# Altium PCB PCB4.PcbDoc (part 5 of 5)
Units mm, origin at the board's own origin, x right, y up, seen from the top; angles counter-clockwise.
Board outline 240 x 180 mm, 2 copper layers (Top Layer, Bottom Layer); 259 components, 311 nets, 1128 pads, 419 vias.
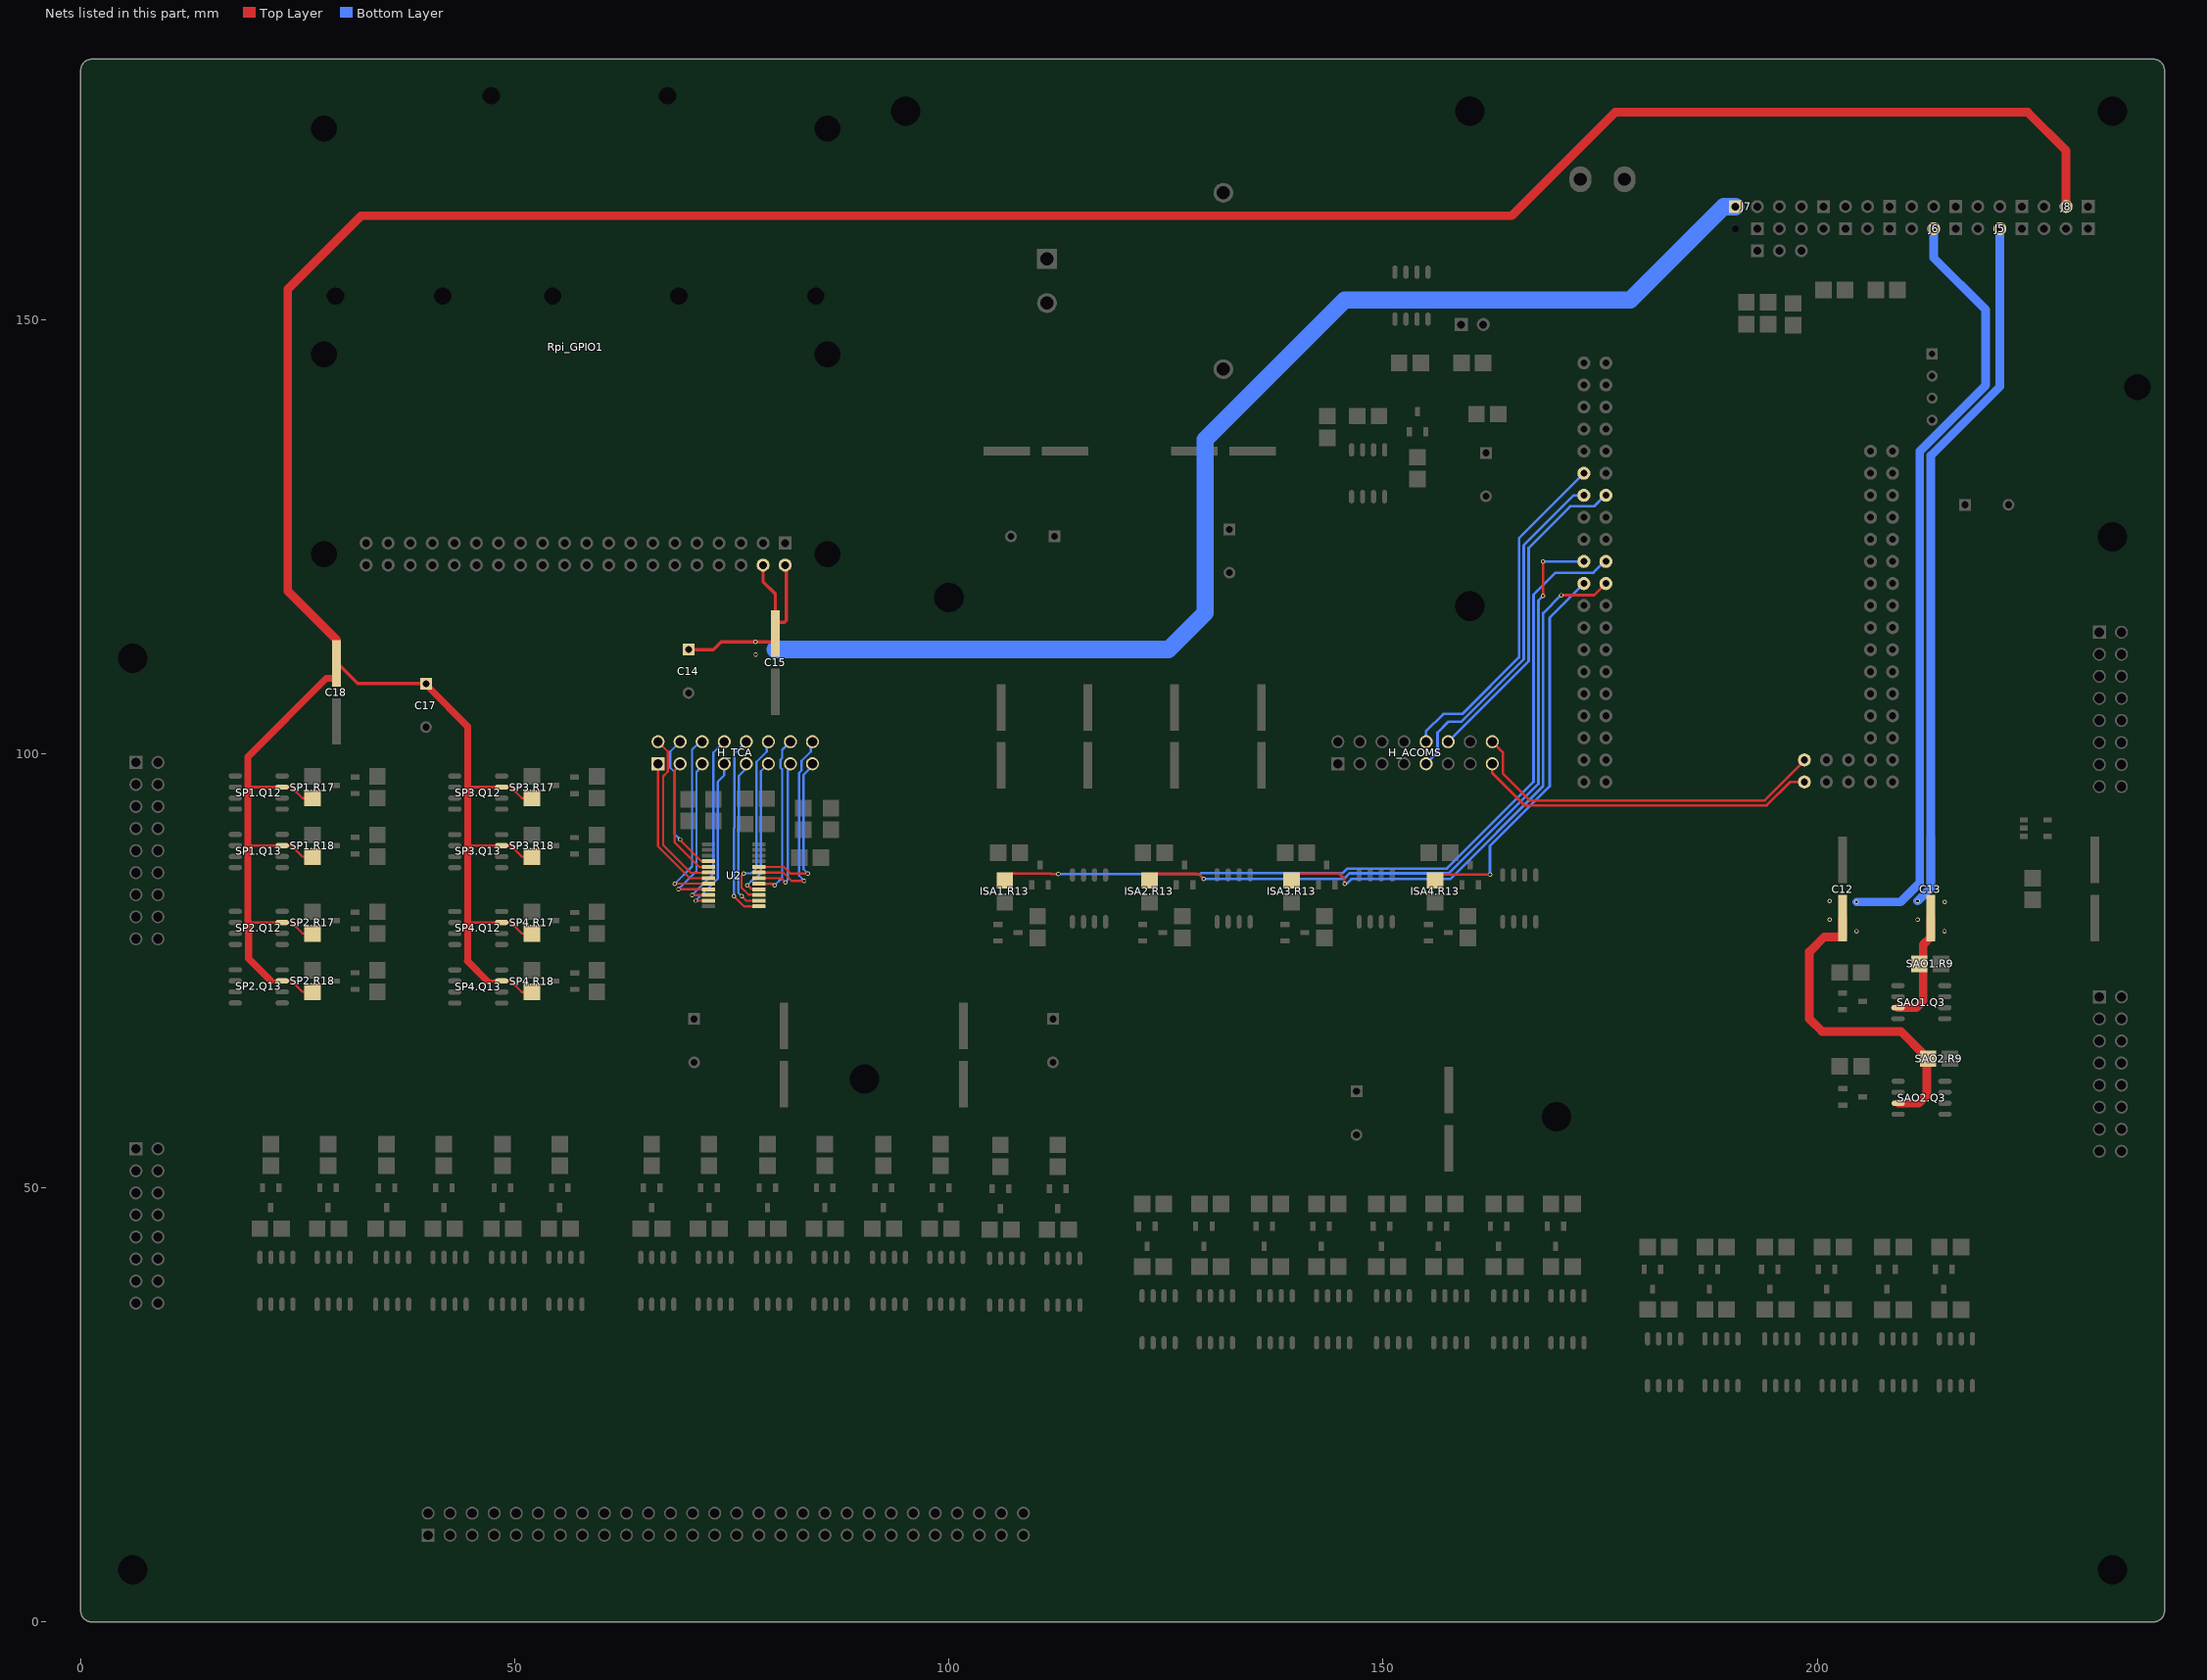
[diagram p4: the nets of this part, all layers, seen from the top]

## Via types
v1: diameter 0.5, hole 0.3, Top Layer to Bottom Layer, 387 vias
v2: diameter 0.5, hole 0.3, Top Layer to Bottom Layer, tented both sides, 24 vias
v3: diameter 1, hole 0.5, Top Layer to Bottom Layer, 8 vias

## Nets (pads, with @x,y where several pads share a name; then routed paths per layer and width w, separated by ;. In a path a pad name is that pad's centre, name@x,y a point inside that pad or via, vN(x,y) a via of type N, cw(c..) or ccw(c..) an arc to the next point about the centre after c; other vN are vias at no path point) (continued)
PWM1: H_ACOMS.12 pad.D4 | length 37.6
  Bottom Layer w0.305: H_ACOMS.12@157.5,101.39 166.768,110.658 166.768,123.714 171.554,128.5 174.3,128.5 175.57,129.77 pad.D4@175.666,129.77
PWM2: H_ACOMS.10 pad.D3 | length 39.7
  Bottom Layer w0.305: H_ACOMS.10@154.944,101.39 154.944,102.584 156.95,104.59 159.119,104.59 165.65,111.121 165.65,124.834 pad.D3@173.126,132.31
rpi_5v_1: C14.1 C15.1 J7.1 Rpi_GPIO1.2 Rpi_GPIO1.4 | length 171
  Top Layer w0.381: C14.1@70.004,112 72.877,112 73.747,112.87 v1(77.72,112.87) 79.694,112.87 80.004,113.18 C15.1@80.004,113.85 C15.1@80.004,114.842 ; Rpi_GPIO1.4@78.59,121.73 78.59,119.828 80.004,118.414 C15.1@80.004,114.842 ; Rpi_GPIO1.2@81.13,121.73 81.031,121.631 81.257,121.405 81.257,115.374 81.034,115.151 80.313,115.151 C15.1@80.004,114.842
  Bottom Layer w2: 80.004,112 125.28,112 129.506,116.226 129.506,136.192 145.578,152.264 178.478,152.264 189.234,163.02 J7.1@190.563,163.02
  other v1: 77.75,111.41
RSW1: ISA1.R13.1 pad.D10 | length 97.1
  Top Layer w0.305: ISA1.R13.1@106.439,85.41 107.237,86.208 111.745,86.208 111.803,86.151 v1(112.605,86.151)
  Bottom Layer w0.305: v1(112.605,86.151) 128.954,86.151 129.051,86.248 145.35,86.248 145.886,86.784 157.348,86.784 167.326,96.763 167.326,118.333 169.848,120.855 174.209,120.855 175.504,122.15 pad.D10@175.666,122.15
RSW2: ISA2.R13.1 pad.D11 | length 80.7
  Top Layer w0.305: ISA2.R13.1@123.097,85.41 123.894,86.208 128.464,86.208 128.538,86.133 128.782,86.133 v1(129.323,85.592) ; v1(168.437,118.208) v1(168.437,122.15)
  Bottom Layer w0.305: v1(129.323,85.592) 145.211,85.592 145.308,85.69 145.582,85.69 146.118,86.226 157.579,86.226 167.885,96.532 167.885,117.656 v1(168.437,118.208) ; v1(168.437,122.15) 172.582,122.15 172.854,121.878 pad.D11@173.126,122.15
RSW3: ISA3.R13.1 pad.D12 | length 63.4
  Top Layer w0.305: ISA3.R13.1@139.464,85.41 140.262,86.208 145.072,86.208 145.072,86.082 145.543,85.612 145.543,85.071 v1(145.58,85.033) ; v1(170.504,118.268) 174.324,118.268 pad.D12@175.666,119.61
  Bottom Layer w0.305: v1(145.58,85.033) 145.617,85.071 145.84,85.071 146.344,85.574 157.718,85.574 168.444,96.3 168.444,116.208 v1(170.504,118.268)
RSW4: ISA4.R13.1 pad.D13 | length 44.6
  Top Layer w0.305: ISA4.R13.1@155.994,85.41 156.681,86.097 v1(162.318,86.097)
  Bottom Layer w0.305: v1(162.318,86.097) 162.318,89.384 169.191,96.257 169.191,115.675 pad.D13@173.126,119.61
SAO1.Vss: C13.1 J5.2 SAO1.Q3.3 SAO1.R9.2 | length 94.9
  Top Layer w1: SAO1.Q3.3@209.3,70.753 211.414,70.753 212.2,71.539 212.2,75.35 SAO1.R9.2@211.75,75.8 212.2,76.25 212.2,78.015 213.08,78.895 C13.1@213.08,81.07
  Bottom Layer w1: v1(211.563,83.043) 213.08,84.56 213.08,134.344 ; 213.086,134.344 221.043,142.302 J5.2@221.043,160.48
  other v1: 214.662,79.57 211.563,80.901 214.693,82.934
SAO2.Vss: C12.1 J6.2 SAO2.Q3.3 SAO2.R9.2 | length 127.1
  Top Layer w1: C12.1@202.934,81.07 202.934,78.895 200.813,78.895 199.104,77.186 199.104,69.468 200.566,68.006 209.656,68.006 212.324,65.338 SAO2.R9.2@212.774,64.888 212.636,64.75 212.636,60.692 211.691,59.746 SAO2.Q3.3@209.324,59.746
  Bottom Layer w1: v1(204.548,82.934) 209.615,82.934 211.81,85.129 211.81,134.85 219.41,142.45 219.41,151.14 213.423,157.127 J6.2@213.423,160.48
  other v1: 204.517,79.57 201.417,80.901 201.417,83.043
SCK: H_ACOMS.15 pad.D52 | length 39.7
  Top Layer w0.305: H_ACOMS.15@162.58,98.85 162.58,97.77 166.289,94.061 194.185,94.061 196.873,96.75 pad.D52@198.526,96.75
SP1.Vss: C17.1 C18.1 J8.2 SP1.Q12.3 SP1.Q13.3 SP1.R17.2 SP1.R18.2 SP2.Q12.3 SP2.Q13.3 SP2.R17.2 SP2.R18.2 SP3.Q12.3 SP3.Q13.3 SP3.R17.2 SP3.R18.2 SP4.Q12.3 SP4.Q13.3 SP4.R17.2 SP4.R18.2 | length 416.6
  Top Layer w0.254: SP2.Q13.3@23.205,73.842 24.277,73.842 25.547,72.572 SP2.R18.2@26.696,72.572 ; SP2.Q12.3@23.205,80.577 24.277,80.577 25.547,79.307 SP2.R17.2@26.696,79.307 ; SP1.Q13.3@23.205,89.432 24.276,89.432 25.546,88.162 SP1.R18.2@26.696,88.162 ; SP1.Q12.3@23.205,96.166 24.276,96.166 25.546,94.896 SP1.R17.2@26.696,94.896 ; SP3.Q13.3@48.48,89.423 49.552,89.423 50.822,88.153 SP3.R18.2@51.971,88.153 ; SP3.Q12.3@48.48,96.158 49.552,96.158 50.822,94.888 SP3.R17.2@51.971,94.888 ; SP4.Q13.3@48.482,73.832 49.553,73.832 50.823,72.562 SP4.R18.2@51.973,72.562 ; SP4.Q12.3@48.482,80.567 49.553,80.567 50.823,79.297 SP4.R17.2@51.973,79.297
  Top Layer w0.305: 19.234,80.577 SP2.Q12.3@23.205,80.577 ; 19.234,89.432 SP1.Q13.3@23.205,89.432 ; 19.234,96.166 SP1.Q12.3@23.205,96.166 ; 21.893,73.842 SP2.Q13.3@23.205,73.842 ; 44.609,89.423 SP3.Q13.3@48.48,89.423 ; 44.609,96.158 SP3.Q12.3@48.48,96.158 ; 44.611,80.567 SP4.Q12.3@48.482,80.567 ; 46.836,73.832 SP4.Q13.3@48.482,73.832
  Top Layer w0.381: C18.1@29.47,110.521 31.91,108.081 39.638,108.081 C17.1@39.646,108.074
  Top Layer w0.61: C18.1@29.275,108.679 C18.1@29.275,110.663 ; C18.1@29.444,110.421 29.47,110.447 29.47,110.521 C18.1@29.47,111.321
  Top Layer w0.8: 19.234,80.577 19.234,82.242 ; 19.234,82.242 19.234,89.432 19.234,96.166 19.234,99.626 28.287,108.679 C18.1@29.157,108.679 ; 19.334,80.577 19.334,76.401 21.893,73.842 ; C17.1@39.646,108.074 C17.1@39.71,108.01 ; C17.1@39.774,108.074 40.049,107.799 40.049,107.667 44.582,103.134 44.582,96.158 44.582,89.423 44.582,80.567 44.582,76.12 ; 44.547,76.12 46.836,73.832
  Top Layer w1: C18.1@29.47,111.321 29.47,113.109 23.846,118.733 23.846,153.522 32.288,161.964 164.808,161.964 176.73,173.886 224.248,173.886 228.663,169.47 J8.2@228.663,163.03
SS: H_ACOMS.16 pad.D53 | length 42.2
  Top Layer w0.305: H_ACOMS.16@162.58,101.39 163.79,100.18 163.79,97.73 166.9,94.62 193.953,94.62 198.526,99.193 pad.D53@198.526,99.29
SSDI-12: H_ACOMS.9 pad.D5 | length 40
  Bottom Layer w0.305: H_ACOMS.9@154.96,98.85 156.28,100.17 156.28,102.44 157.54,103.7 159.02,103.7 166.209,110.889 166.209,124.03 171.948,129.77 pad.D5@173.126,129.77
tca_sc0: H_TCA.3 U2.5 | length 14.5
  Top Layer w0.254: H_TCA.3@69.04,98.85 69.04,98.701 68.42,98.081 68.42,89.787 71.232,86.975 U2.5@72.413,86.975
tca_sc1: H_TCA.1 U2.7 | length 16.9
  Top Layer w0.254: H_TCA.1@66.5,98.85 66.5,89.34 70.165,85.675 U2.7@72.363,85.675
tca_sc2: H_TCA.5 U2.9 | length 19.5
  Top Layer w0.254: v2(68.837,84.397) 68.848,84.386 72.771,84.386 U2.9@72.782,84.375
  Bottom Layer w0.254: v2(68.837,84.397) 70.924,86.484 70.924,97.907 71.58,98.562 H_TCA.5@71.58,98.85
tca_sc3: H_TCA.7 U2.11 | length 18.6
  Top Layer w0.254: v2(70.82,83.074) U2.11@72.309,83.075
  Bottom Layer w0.254: v2(70.82,83.074) 71.239,83.493 73.368,85.622 73.368,96.773 74.12,97.525 H_TCA.7@74.12,98.85
tca_sc4: H_TCA.9 U2.14 | length 17.9
  Top Layer w0.254: v2(76.116,83.602) 76.643,83.075 U2.14@78.057,83.075
  Bottom Layer w0.254: v2(76.116,83.602) 75.741,83.978 75.741,91.229 75.805,91.294 75.805,97.462 76.422,98.079 76.422,98.612 H_TCA.9@76.66,98.85
tca_sc5: H_TCA.11 U2.16 | length 16.5
  Top Layer w0.254: v2(76.76,84.844) 76.803,84.844 77.228,84.419 U2.16@77.977,84.419
  Bottom Layer w0.254: v2(76.76,84.844) 77.472,85.556 77.676,85.556 78.341,86.221 78.341,97.991 H_TCA.11@79.2,98.85
tca_sc6: H_TCA.13 U2.18 | length 17.1
  Top Layer w0.254: U2.18@78.134,85.675 80.678,85.675 v2(81.16,85.193)
  Bottom Layer w0.254: v2(81.16,85.193) 81.453,85.487 81.453,98.078 81.502,98.127 81.502,98.612 H_TCA.13@81.74,98.85
tca_sc7: H_TCA.15 U2.20 | length 19.2
  Top Layer w0.254: U2.20@78.109,86.975 80.989,86.975 81.76,86.204 v2(83.736,86.204)
  Bottom Layer w0.254: v2(83.736,86.204) 83.236,86.704 83.236,97.578 84.28,98.623 H_TCA.15@84.28,98.85
tca_sd0: H_TCA.4 U2.4 | length 16.6
  Top Layer w0.254: v2(69.051,90.126) 69.051,90.06 69.174,89.937 69.174,89.925 71.178,87.921 71.43,87.669 71.686,87.669 71.766,87.589 U2.4@72.345,87.589
  Bottom Layer w0.254: H_TCA.4@69.04,101.39 67.909,100.259 67.909,98.382 68.42,97.871 68.42,90.757 v2(69.051,90.126)
tca_sd1: H_TCA.2 U2.6 | length 19.3
  Top Layer w0.254: H_TCA.2@66.5,101.39 67.631,100.259 67.631,97.942 67.078,97.389 67.078,89.481 70.271,86.288 U2.6@72.414,86.288
tca_sd2: H_TCA.6 U2.8 | length 21.7
  Top Layer w0.254: v2(68.42,85.025) 68.445,85.05 72.274,85.05 U2.8@72.293,85.069
  Bottom Layer w0.254: v2(68.42,85.025) 70.416,87.021 70.416,100.462 71.344,101.39 H_TCA.6@71.58,101.39
tca_sd3: H_TCA.8 U2.10 | length 21.1
  Top Layer w0.254: v2(70.416,83.725) U2.10@72.309,83.725
  Bottom Layer w0.254: v2(70.416,83.725) 72.86,86.169 72.86,100.13 H_TCA.8@74.12,101.39
tca_sd4: H_TCA.10 U2.13 | length 21.3
  Top Layer w0.254: v2(75.233,83.593) 76.401,82.425 U2.13@77.704,82.425
  Bottom Layer w0.254: v2(75.233,83.593) 75.233,91.453 75.297,91.517 75.297,100.027 H_TCA.10@76.66,101.39
tca_sd5: H_TCA.12 U2.15 | length 20.9
  Top Layer w0.254: v2(76.372,86.221) 76.372,86.205 76.116,85.95 76.116,84.568 76.915,83.769 78.065,83.769 U2.15@78.109,83.725
  Bottom Layer w0.254: v2(76.372,86.221) 77.209,86.221 77.827,86.839 77.827,99.076 79.009,100.259 79.009,101.2 H_TCA.12@79.2,101.39
tca_sd6: H_TCA.14 U2.17 | length 19.5
  Top Layer w0.254: U2.17@77.91,85.025 79.684,85.025 79.856,84.852 v2(79.923,84.852)
  Bottom Layer w0.254: v2(79.923,84.852) 80.796,85.726 80.796,98.194 80.609,98.382 80.609,99.319 80.796,99.506 80.796,100.446 H_TCA.14@81.74,101.39
tca_sd7: H_TCA.16 U2.19 | length 22.6
  Top Layer w0.254: U2.19@78.084,86.325 80.92,86.325 81.879,85.366 v2(83.335,85.366)
  Bottom Layer w0.254: v2(83.335,85.366) 82.728,85.973 82.728,97.789 83.023,98.084 83.023,99.192 84.089,100.259 84.089,101.2 H_TCA.16@84.28,101.39
pads on no net: DHT1.0 DHT1.3 MH1.0 MH2.0 MH3.0 MH4.0 MH5.0 MH6.0 MH7.0 MH8.0 MH10.0 MH11.0 MH12.0 Q5.1 Q5.2 Q5.7 Q5.8 Rpi_GPIO1.0 Rpi_GPIO1.1 Rpi_GPIO1.17 Rpi_GPIO1.27 Rpi_GPIO1.28

## Polygon pours and split planes (outlines as drawn)
GND on Bottom Layer "Bottom Layer-GND" (solid, remove dead copper, pour order 298): 4,4 4,176 236,176 236,4
GND-12V on Bottom Layer "Bottom Layer-GND-12V" (solid, remove dead copper, pour order 219): 106.155,123.362 108.22,123.362 109.196,124.338 109.196,127.947 115.57,134.321 115.57,160.48 109.663,160.48 107.95,158.767 107.95,140.347 107.143,139.54 104.103,139.54 103.01,138.447 103.01,131.04 103.84,130.21 104.978,129.072 104.978,124.538
SAO1.Vss on Bottom Layer "SAO1.VSS_L02_P292" (solid, pour order 292): 215.446,83.404 214.43,84.42 211.69,84.42 210.581,83.311 210.581,79.079 211.936,77.724 214.294,77.724 215.446,78.876
SAO2.Vss on Bottom Layer "SAO2.VSS_L02_P220" (solid, pour order 220): 205.3,83.404 204.284,84.42 201.544,84.42 200.435,83.311 200.435,79.079 201.79,77.724 204.148,77.724 205.3,78.876
5V on Bottom Layer "Bottom Layer-5V 1" (solid, remove dead copper, pour order 215): 225.229,166.796 225.229,169.027 225.838,169.637 227.039,169.637 228.038,168.638 228.038,164.3 224.862,164.3 224.862,166.428
5V on Bottom Layer "Bottom Layer-5V" (solid, remove dead copper, pour order 217): 233.51,76.6 236.48,76.6 236.48,71.563 235.437,70.52 233.51,70.52
rpi_5v_1 on Bottom Layer "Bottom Layer-rpi_5v_1 1" (solid, remove dead copper, pour order 218): 76.83,113.76 82.88,113.76 82.88,112.03 81.27,110.42 76.83,110.42
GND on Top Layer "Top Layer-GND" (solid, remove dead copper, pour order 300): 4,4 4,176 236,176 236,4
PI_LS_2 on Top Layer "PI_LS_2_L01_P182" (solid, pour order 182): 16.747,88.714 16.599,88.566 16.599,86.382 16.934,86.047 17.955,86.047 17.955,88.714
SP1.Vss on Top Layer "SP1.VSS_L01_P229" (solid, pour order 229): 26.694,107.086 27.909,108.302 27.909,114.071 30.371,114.071 31.243,113.199 31.243,110.76 32.308,109.696 40.612,109.696 41.231,109.077 41.231,107.086 40.735,106.59 37.852,106.59 37.356,107.086
PI_HS_4 on Top Layer "PI_HS_4_L01_P180" (solid, pour order 180): 17.106,75.957 16.6,75.45 16.6,73.572 16.862,73.31 17.956,73.31 17.956,75.957
PI_LS_6 on Top Layer "PI_LS_6_L01_P181" (solid, pour order 181): 42.357,88.705 41.875,88.223 41.875,86.373 42.21,86.038 43.231,86.038 43.231,88.705
PI_LS_1 on Top Layer "PI_LS_1_L01_P183" (solid, pour order 183): 17.082,95.448 16.599,94.966 16.599,93.116 16.934,92.781 17.955,92.781 17.955,95.448
PI_LS_3 on Top Layer "PI_LS_3_L01_P184" (solid, pour order 184): 17.082,79.859 16.6,79.376 16.6,77.527 16.935,77.192 17.956,77.192 17.956,79.859
PI_LS_8 on Top Layer "PI_LS_8_L01_P185" (solid, pour order 185): 42.359,73.114 41.876,72.632 41.876,70.782 42.211,70.447 43.232,70.447 43.232,73.114
PI_LS_7 on Top Layer "PI_LS_7_L01_P186" (solid, pour order 186): 42.359,79.849 41.876,79.366 41.876,77.517 42.211,77.182 43.232,77.182 43.232,79.849
PI_LS_4 on Top Layer "PI_LS_4_L01_P187" (solid, pour order 187): 17.082,73.124 16.6,72.642 16.6,70.792 16.935,70.457 17.956,70.457 17.956,73.124
PI_HS_7 on Top Layer "PI_HS_7_L01_P188" (solid, pour order 188): 42.383,82.682 41.876,82.175 41.876,80.297 42.162,80.012 43.232,80.012 43.232,82.682
PI_HS_8 on Top Layer "PI_HS_8_L01_P189" (solid, pour order 189): 42.383,75.947 41.876,75.44 41.876,73.562 42.162,73.277 43.232,73.277 43.232,75.947
PI_HS_6 on Top Layer "PI_HS_6_L01_P190" (solid, pour order 190): 42.381,91.538 41.875,91.031 41.875,89.153 42.161,88.867 43.231,88.867 43.231,91.538
PI_LS_5 on Top Layer "PI_LS_5_L01_P191" (solid, pour order 191): 42.323,95.44 41.875,94.992 41.875,93.108 42.21,92.773 43.231,92.773 43.231,95.44
PI_HS_2 on Top Layer "PI_HS_2_L01_P192" (solid, pour order 192): 17.106,91.546 16.599,91.04 16.599,89.162 16.894,88.867 17.955,88.867 17.955,91.547
PI_HS_5 on Top Layer "PI_HS_5_L01_P193" (solid, pour order 193): 42.381,98.273 41.875,97.766 41.875,95.888 42.17,95.593 43.231,95.593 43.231,98.273
PI_HS_1 on Top Layer "PI_HS_1_L01_P194" (solid, pour order 194): 17.106,98.281 16.599,97.774 16.599,95.897 16.903,95.593 17.955,95.593 17.955,98.281
PI_HS_3 on Top Layer "PI_HS_3_L01_P195" (solid, pour order 195): 17.106,82.692 16.6,82.185 16.6,80.307 16.905,80.002 17.956,80.002 17.956,82.692
5V on Top Layer "5V_L01_P288" (solid, pour order 288): 98.831,65.557 104.546,65.557 105.943,66.954 112.011,66.954 114.925,64.04 117.823,61.142 117.823,58.652 119.25,58.652 119.781,59.183 129.867,59.184 154.394,59.184 155.678,57.9 158.916,57.9 160.65,59.634 160.65,63.65 159.165,65.135 156.076,65.135 154.29,63.35 122.142,63.35 119.746,65.746 113.18,72.312 105.036,72.312 102.322,75.026 100.201,75.026 97.7,72.524 70.495,72.524 69.04,71.069 69.04,68.128 70.214,66.954 77.21,66.954 78.607,65.557 83.84,65.557 85.237,66.954 97.434,66.954
INV_5V12V_LS_1 on Top Layer "INV_5V12V_LS_1_L01_P211" (solid, pour order 211): 116.182,79.891 116.925,79.147 118.323,79.147 118.849,79.673 118.849,80.799 116.182,80.799
INV_5V12V_LS_2 on Top Layer "INV_5V12V_LS_2_L01_P223" (solid, pour order 223): 132.712,79.89 133.454,79.148 134.855,79.148 135.379,79.672 135.379,80.798 132.712,80.798
INV_5V12V_HS_2 on Top Layer "INV_5V12V_HS_2_L01_P224" (solid, pour order 224): 129.879,79.65 130.382,79.147 131.969,79.147 132.559,79.737 132.559,80.798 129.879,80.798
INV_5V12V_LS_3 on Top Layer "INV_5V12V_LS_3_L01_P225" (solid, pour order 225): 149.242,79.89 149.985,79.147 151.384,79.147 151.909,79.672 151.909,80.798 149.242,80.798
INV_5V12V_HS_3 on Top Layer "INV_5V12V_HS_3_L01_P226" (solid, pour order 226): 146.409,79.672 146.933,79.148 148.5,79.148 149.089,79.737 149.089,80.798 146.409,80.798
INV_5V12V_LS_4 on Top Layer "INV_5V12V_LS_4_L01_P227" (solid, pour order 227): 165.772,79.89 166.514,79.148 167.915,79.148 168.439,79.672 168.439,80.798 165.772,80.798
INV_5V12V_HS_4 on Top Layer "INV_5V12V_HS_4_L01_P228" (solid, pour order 228): 162.939,79.672 163.464,79.147 165.029,79.147 165.619,79.737 165.619,80.798 162.939,80.798
12V on Top Layer "Top Layer-12V" (solid, pour order 209): 107.95,151 107.95,134.469 110.007,132.411 110.039,132.336 110.039,123.362 114.07,123.362 116.99,126.282 116.99,157.95 114.9,157.95
NetJ7_2 on Top Layer "NETJ7_2_L01_P231" (solid, pour order 231): 153.651,157.043 152.973,156.365 152.973,154.66 153.718,153.914 155.756,153.914 155.756,154.27 156.016,154.53 156.016,156.493 155.466,157.043
GND-12V on Top Layer "Top Layer-GND-12V" (solid, remove dead copper, pour order 206): 103,139.52 103.002,126.823 106.463,123.362 109.78,123.362 109.78,139.52
5V12V_LS_2 on Top Layer "5V12V_LS_2_L01_P197" (solid, remove dead copper, pour order 197): 213.994,63.131 213.994,60.475 216.276,60.475 216.914,61.113 216.914,62.338 216.12,63.131
SAO1.Vss on Top Layer "SAO1.VSS_L01_P295" (solid, pour order 295): 215.456,83.371 214.441,84.387 211.701,84.387 210.592,83.278 210.592,79.046 211.947,77.691 214.304,77.691 215.456,78.843
SAO2.Vss on Top Layer "SAO2.VSS_L01_P294" (solid, pour order 294): 205.311,83.371 204.295,84.387 201.555,84.387 200.446,83.278 200.446,79.046 201.801,77.691 204.159,77.691 205.311,78.843
NetC29_1 on Top Layer "NETC29_1_L01_P291" (solid, pour order 291): 148.353,128.853 149.095,128.11 150.495,128.11 151.02,128.635 151.02,129.761 148.352,129.761
HS_I2C_SW on Top Layer "HS_I2C_SW_L01_P290" (solid, pour order 290): 145.52,128.635 146.044,128.111 147.61,128.111 148.2,128.7 148.2,129.761 145.52,129.761
INV_5V12V_HS_1 on Top Layer "INV_5V12V_HS_1_L01_P222" (solid, pour order 222): 113.349,79.673 113.959,79.063 115.354,79.063 116.029,79.738 116.029,80.799 113.349,80.799
5V on Top Layer "5V_L01_P230" (solid, pour order 230): 141.854,141.75 141.854,138.124 146.418,133.56 151.516,133.56 151.516,137.111 146.877,141.75
5V_HS_13 on Top Layer "5V_HS_13_L01_P257" (solid, remove dead copper, pour order 257): 106.582,37.223 103.832,37.223 103.832,35.518 104.73,34.62 105.684,34.62 106.582,35.518
5V_HS_6 on Top Layer "5V_HS_6_L01_P243" (solid, remove dead copper, pour order 243): 55.826,37.328 53.076,37.328 53.076,35.623 53.974,34.725 54.927,34.725 55.826,35.623
5V_HS_5 on Top Layer "5V_HS_5_L01_P241" (solid, remove dead copper, pour order 241): 49.222,37.328 46.472,37.328 46.472,35.623 47.37,34.725 48.324,34.725 49.222,35.623
5V_LS_12 on Top Layer "5V_LS_12_L01_P254" (solid, remove dead copper, pour order 254): 102.446,37.328 99.79,37.328 99.79,35.529 100.594,34.725 101.548,34.725 102.446,35.623
5V_HS_28 on Top Layer "5V_HS_28_L01_P287" (solid, remove dead copper, pour order 287): 215.968,27.945 213.218,27.945 213.218,26.24 214.116,25.342 215.07,25.342 215.968,26.24
5V_LS_28 on Top Layer "5V_LS_28_L01_P286" (solid, remove dead copper, pour order 286): 218.718,27.945 216.063,27.945 216.063,26.146 216.866,25.342 217.82,25.342 218.718,26.24
5V_HS_27 on Top Layer "5V_HS_27_L01_P285" (solid, remove dead copper, pour order 285): 209.365,27.945 206.615,27.945 206.615,26.24 207.513,25.342 208.467,25.342 209.365,26.24
5V_LS_27 on Top Layer "5V_LS_27_L01_P284" (solid, remove dead copper, pour order 284): 212.115,27.945 209.46,27.945 209.46,26.146 210.263,25.342 211.217,25.342 212.115,26.24
5V_HS_26 on Top Layer "5V_HS_26_L01_P283" (solid, remove dead copper, pour order 283): 202.47,27.947 199.72,27.947 199.72,26.242 200.618,25.344 201.572,25.344 202.47,26.242
5V_LS_26 on Top Layer "5V_LS_26_L01_P282" (solid, remove dead copper, pour order 282): 205.22,27.947 202.565,27.947 202.565,26.148 203.368,25.344 204.322,25.344 205.22,26.242
5V_HS_25 on Top Layer "5V_HS_25_L01_P281" (solid, remove dead copper, pour order 281): 195.867,27.947 193.117,27.947 193.117,26.242 194.015,25.344 194.969,25.344 195.867,26.242
5V_LS_25 on Top Layer "5V_LS_25_L01_P280" (solid, remove dead copper, pour order 280): 198.617,27.947 195.961,27.947 195.961,26.148 196.765,25.344 197.719,25.344 198.617,26.242
5V_HS_24 on Top Layer "5V_HS_24_L01_P279" (solid, remove dead copper, pour order 279): 188.972,27.947 186.222,27.947 186.222,26.242 187.12,25.344 188.074,25.344 188.972,26.242
5V_LS_24 on Top Layer "5V_LS_24_L01_P278" (solid, remove dead copper, pour order 278): 191.722,27.947 189.066,27.947 189.066,26.148 189.87,25.344 190.824,25.344 191.722,26.242
5V_HS_23 on Top Layer "5V_HS_23_L01_P277" (solid, remove dead copper, pour order 277): 182.369,27.947 179.619,27.947 179.619,26.242 180.517,25.344 181.471,25.344 182.369,26.242
5V_LS_23 on Top Layer "5V_LS_23_L01_P276" (solid, remove dead copper, pour order 276): 185.119,27.947 182.463,27.947 182.463,26.148 183.267,25.344 184.221,25.344 185.119,26.242
5V_HS_22 on Top Layer "5V_HS_22_L01_P275" (solid, remove dead copper, pour order 275): 171.245,32.896 168.495,32.896 168.495,31.191 169.393,30.293 170.347,30.293 171.245,31.191
5V_LS_22 on Top Layer "5V_LS_22_L01_P274" (solid, remove dead copper, pour order 274): 173.995,32.896 171.34,32.896 171.34,31.096 172.143,30.293 173.097,30.293 173.995,31.191
5V_HS_21 on Top Layer "5V_HS_21_L01_P273" (solid, remove dead copper, pour order 273): 164.642,32.896 161.892,32.896 161.892,31.191 162.79,30.293 163.744,30.293 164.642,31.191
5V_LS_21 on Top Layer "5V_LS_21_L01_P272" (solid, remove dead copper, pour order 272): 167.392,32.896 164.736,32.896 164.736,31.096 165.54,30.293 166.494,30.293 167.392,31.191
5V_HS_20 on Top Layer "5V_HS_20_L01_P271" (solid, remove dead copper, pour order 271): 157.745,32.897 154.995,32.897 154.995,31.192 155.893,30.294 156.847,30.294 157.745,31.192
5V_LS_20 on Top Layer "5V_LS_20_L01_P270" (solid, remove dead copper, pour order 270): 160.495,32.897 157.84,32.897 157.84,31.098 158.643,30.294 159.597,30.294 160.495,31.192
5V_HS_19 on Top Layer "5V_HS_19_L01_P269" (solid, remove dead copper, pour order 269): 151.142,32.897 148.392,32.897 148.392,31.192 149.29,30.294 150.244,30.294 151.142,31.192
5V_LS_19 on Top Layer "5V_LS_19_L01_P268" (solid, remove dead copper, pour order 268): 153.892,32.897 151.236,32.897 151.236,31.098 152.04,30.294 152.994,30.294 153.892,31.192
5V_HS_18 on Top Layer "5V_HS_18_L01_P267" (solid, remove dead copper, pour order 267): 144.247,32.897 141.497,32.897 141.497,31.192 142.395,30.294 143.349,30.294 144.247,31.192
5V_LS_18 on Top Layer "5V_LS_18_L01_P266" (solid, remove dead copper, pour order 266): 146.997,32.897 144.342,32.897 144.342,31.098 145.145,30.294 146.099,30.294 146.997,31.192
5V_HS_17 on Top Layer "5V_HS_17_L01_P265" (solid, remove dead copper, pour order 265): 137.644,32.897 134.894,32.897 134.894,31.192 135.792,30.294 136.746,30.294 137.644,31.192
5V_LS_17 on Top Layer "5V_LS_17_L01_P264" (solid, remove dead copper, pour order 264): 140.394,32.897 137.738,32.897 137.738,31.098 138.542,30.294 139.496,30.294 140.394,31.192
5V_HS_16 on Top Layer "5V_HS_16_L01_P263" (solid, remove dead copper, pour order 263): 130.751,32.897 128.001,32.897 128.001,31.192 128.899,30.294 129.853,30.294 130.751,31.192
5V_LS_16 on Top Layer "5V_LS_16_L01_P262" (solid, remove dead copper, pour order 262): 133.501,32.897 130.846,32.897 130.846,31.098 131.649,30.294 132.603,30.294 133.501,31.192
5V_HS_15 on Top Layer "5V_HS_15_L01_P261" (solid, remove dead copper, pour order 261): 124.148,32.897 121.398,32.897 121.398,31.192 122.296,30.294 123.25,30.294 124.148,31.192
5V_LS_15 on Top Layer "5V_LS_15_L01_P260" (solid, remove dead copper, pour order 260): 126.898,32.897 124.242,32.897 124.242,31.098 125.046,30.294 126,30.294 126.898,31.192
5V_HS_14 on Top Layer "5V_HS_14_L01_P259" (solid, remove dead copper, pour order 259): 113.185,37.223 110.435,37.223 110.435,35.518 111.333,34.62 112.287,34.62 113.185,35.518
5V_LS_14 on Top Layer "5V_LS_14_L01_P258" (solid, remove dead copper, pour order 258): 115.935,37.223 113.28,37.223 113.28,35.424 114.083,34.62 115.037,34.62 115.935,35.518
5V_LS_13 on Top Layer "5V_LS_13_L01_P256" (solid, remove dead copper, pour order 256): 109.332,37.223 106.676,37.223 106.676,35.424 107.48,34.62 108.434,34.62 109.332,35.518
5V_HS_12 on Top Layer "5V_HS_12_L01_P255" (solid, remove dead copper, pour order 255): 99.696,37.328 96.946,37.328 96.946,35.623 97.844,34.725 98.797,34.725 99.696,35.623
5V_HS_11 on Top Layer "5V_HS_11_L01_P253" (solid, remove dead copper, pour order 253): 93.092,37.328 90.342,37.328 90.342,35.623 91.24,34.725 92.194,34.725 93.092,35.623
5V_LS_11 on Top Layer "5V_LS_11_L01_P252" (solid, remove dead copper, pour order 252): 95.842,37.328 93.187,37.328 93.187,35.529 93.99,34.725 94.944,34.725 95.842,35.623
5V_HS_10 on Top Layer "5V_HS_10_L01_P251" (solid, remove dead copper, pour order 251): 86.354,37.328 83.604,37.328 83.604,35.623 84.502,34.725 85.455,34.725 86.354,35.623
5V_LS_10 on Top Layer "5V_LS_10_L01_P250" (solid, remove dead copper, pour order 250): 89.104,37.328 86.448,37.328 86.448,35.529 87.252,34.725 88.206,34.725 89.104,35.623
5V_HS_9 on Top Layer "5V_HS_9_L01_P249" (solid, remove dead copper, pour order 249): 79.75,37.328 77,37.328 77,35.623 77.898,34.725 78.852,34.725 79.75,35.623
5V_LS_9 on Top Layer "5V_LS_9_L01_P248" (solid, remove dead copper, pour order 248): 82.5,37.328 79.845,37.328 79.845,35.529 80.648,34.725 81.602,34.725 82.5,35.623
5V_HS_8 on Top Layer "5V_HS_8_L01_P247" (solid, remove dead copper, pour order 247): 73.014,37.328 70.264,37.328 70.264,35.623 71.162,34.725 72.115,34.725 73.014,35.623
5V_LS_8 on Top Layer "5V_LS_8_L01_P246" (solid, remove dead copper, pour order 246): 75.764,37.328 73.108,37.328 73.108,35.529 73.912,34.725 74.866,34.725 75.764,35.623
5V_HS_7 on Top Layer "5V_HS_7_L01_P245" (solid, remove dead copper, pour order 245): 66.41,37.328 63.66,37.328 63.66,35.623 64.558,34.725 65.512,34.725 66.41,35.623
5V_LS_7 on Top Layer "5V_LS_7_L01_P244" (solid, remove dead copper, pour order 244): 69.16,37.328 66.505,37.328 66.505,35.529 67.308,34.725 68.262,34.725 69.16,35.623
5V_LS_6 on Top Layer "5V_LS_6_L01_P242" (solid, remove dead copper, pour order 242): 58.576,37.328 55.92,37.328 55.92,35.529 56.724,34.725 57.678,34.725 58.576,35.623
5V_LS_5 on Top Layer "5V_LS_5_L01_P240" (solid, remove dead copper, pour order 240): 51.972,37.328 49.317,37.328 49.317,35.529 50.12,34.725 51.074,34.725 51.972,35.623
5V_HS_4 on Top Layer "5V_HS_4_L01_P239" (solid, remove dead copper, pour order 239): 42.484,37.328 39.734,37.328 39.734,35.623 40.632,34.725 41.585,34.725 42.484,35.623
5V_LS_4 on Top Layer "5V_LS_4_L01_P238" (solid, remove dead copper, pour order 238): 45.234,37.328 42.578,37.328 42.578,35.529 43.382,34.725 44.336,34.725 45.234,35.623
5V_HS_3 on Top Layer "5V_HS_3_L01_P237" (solid, remove dead copper, pour order 237): 35.88,37.328 33.13,37.328 33.13,35.623 34.028,34.725 34.982,34.725 35.88,35.623
5V_LS_3 on Top Layer "5V_LS_3_L01_P236" (solid, remove dead copper, pour order 236): 38.63,37.328 35.975,37.328 35.975,35.529 36.778,34.725 37.732,34.725 38.63,35.623
5V_HS_2 on Top Layer "5V_HS_2_L01_P235" (solid, remove dead copper, pour order 235): 29.142,37.329 26.392,37.329 26.392,35.624 27.29,34.726 28.243,34.725 29.142,35.624
5V_LS_2 on Top Layer "5V_LS_2_L01_P234" (solid, remove dead copper, pour order 234): 31.892,37.329 29.236,37.329 29.236,35.529 30.04,34.726 30.994,34.726 31.892,35.624
5V_HS_1 on Top Layer "5V_HS_1_L01_P233" (solid, remove dead copper, pour order 233): 22.538,37.329 19.788,37.329 19.788,35.624 20.686,34.726 21.64,34.725 22.538,35.624
5V_LS_1 on Top Layer "5V_LS_1_L01_P232" (solid, remove dead copper, pour order 232): 25.288,37.329 22.633,37.329 22.633,35.529 23.436,34.726 24.39,34.726 25.288,35.624
5V on Top Layer "Top Layer-5V" (solid, remove dead copper, pour order 210): 131.539,130.725 134.975,127.289 134.975,124.26 133.893,123.178 131.229,123.178 129.93,124.477 129.93,126.155 124.614,131.471 124.614,142.223 129.541,147.15 133.466,147.15 135.624,144.992 135.624,139.525 135.549,139.493 134.356,138.301 133.085,138.301 133.009,138.269 131.539,136.798
5V12V_HS_2 on Top Layer "5V12V_HS_2_L01_P200" (solid, remove dead copper, pour order 200): 213.994,60.381 213.994,57.631 216.372,57.631 216.913,58.173 216.914,59.727 216.259,60.381
rpi_5v_1 on Top Layer "Bottom Layer-rpi_5v_1" (solid, remove dead copper, pour order 208): 68.34,111.12 68.34,112.95 69.05,113.66 75.784,113.66 77.014,114.89 77.014,123.02 82.76,123.02 82.76,111.91 81.27,110.42 69.04,110.42
5V12V_HS_1 on Top Layer "5V12V_HS_1_L01_P199" (solid, remove dead copper, pour order 199): 213.97,71.388 213.97,68.638 215.675,68.638 216.573,69.536 216.573,70.49 215.675,71.388
5V12V_LS_1 on Top Layer "5V12V_LS_1_L01_P198" (solid, remove dead copper, pour order 198): 213.97,74.138 213.97,71.483 215.77,71.483 216.573,72.286 216.573,73.24 215.675,74.138
5V on Top Layer "Top Layer-5V 2" (solid, remove dead copper, pour order 205): 225.26,161.357 225.224,169.018 225.836,169.63 226.701,169.63 227.872,168.459 227.872,158.63 227.235,158.63 226.918,158.947 226.918,160.084 225.645,161.357
5V on Top Layer "Top Layer-5V 1" (solid, remove dead copper, pour order 204): 233.53,76.24 236.5,76.24 236.5,71.68 235.34,70.52 233.53,70.52
3.3V on Top Layer "Top Layer-3.3V" (solid, remove dead copper, pour order 196): 226.257,96.05 226.06,95.853 226.06,92.03 230.684,92.03

## Silkscreen, mask and mechanical layers (free items; w line width, h text height)
Top Overlay:
  drawing of 35 lines, arcs and shapes, not listed
  text "12V" at 169.3,172 h3
  text "GND" at 176,172 h3
  text "Rev ._Revision" at 208.343,171.59 h2
  text "RSW10" at 195.144,167.138 h2
  text "RSW11" at 202.51,167.138 h2
  text "RSW12" at 210.892,167.138 h2
  text "RSW13" at 218.258,167.138 h2
  text "PiSW_LV" at 225.878,167.138 h1.52
  text "THE UNIVERSITY  / OF QUEENSLAND" at 42.969,165.737 h1.56
  text "R PWR" at 189.667,165.306 h1.52
  text "5V" at 195.024,165.306 h1.52
  text "12V" at 199.453,165.306 h1.52
  text "5V" at 202.501,165.306 h1.52
  text "12V" at 207.133,165.306 h1.52
  text "5V" at 209.867,165.306 h1.52
  text "12V" at 214.693,165.306 h1.52
  text "5V" at 217.741,165.306 h1.52
  text "12V" at 222.313,165.306 h1.52
  text "5V" at 225.361,165.306 h1.52
  text "3V3" at 229.933,165.306 h1.52
  text "AUSTRALIA" at 43.453,163.701 h1.17
  text "GEOTECHNICAL / ENGINEERING / CENTER" at 64.965,163.456 h1.56 r359.91
  text "Rev ._Revision" at 65.171,160.51 h2
  text "PLUG-IN" at 170.1,158.5 h3
  text "LS" at 207.65,157.449 h1.52
  text "HS" at 200.025,157.432 h1.52
  text "5V" at 209.876,157.432 h1.52
  text "12V" at 214.693,157.432 h1.52
  text "5V" at 217.487,157.432 h1.52
  text "12V" at 222.313,157.432 h1.52
  text "GND" at 225.361,157.432 h1.8
  text "G-12" at 229.171,157.432 h1.8
  text "Vsense" at 200.593,155.5 h2.3
  text "SW9_LV" at 210,155.5 h2
  text "SW8_LV" at 217.6,155.5 h2
  text "Sftw" at 191.8,155.282 h1.52
  text "Hdw" at 196.522,155.252 h1.52
  text "Tx/Rx" at 192.856,153.6 h2.3
  text "**" at 159.604,147.804 h1.52 r180
  text "U1" at 169.033,96.116 h1.6
Bottom Overlay:
  drawing of 4 lines, arcs and shapes, not listed
  text "THE UNIVERSITY  / OF QUEENSLAND" at 142.866,169.862 h1.56
  text "AUSTRALIA" at 142.383,167.826 h1.17
  text "GEOTECHNICAL / ENGINEERING / CENTER" at 120.87,167.581 h1.56 r0.09
  text "Rev ._Revision" at 120.202,164.635 h2
Drill Guide:
  lines w0.254: 1.27,0 cw(c1.27,1.27) 0,1.27 0,178.73 cw(c1.27,178.73) 1.27,180 238.73,180 cw(c238.73,178.73) 240,178.73 240,1.27 cw(c238.73,1.27) 238.73,0 1.3,0
Mechanical 1:
  the board outline again, w0.254
Drill Drawing:
  drawing of 165 lines, arcs and shapes, not listed
  text "Symbol" at 1.05,249.358 h1.83
  text "Count" at 13.899,249.358 h1.83
  text "Hole Size" at 29.135,249.358 h1.83
  text "Plated" at 58.336,249.358 h1.83
  text "Hole Type" at 71.185,249.358 h1.83
  text "Drill Layer Pair" at 89.824,249.358 h1.83
  text "Via/Pad" at 127.913,249.358 h1.83
  text "Pad Shape" at 142.895,249.358 h1.83
  text "Template" at 161.838,249.358 h1.83
  text "Description" at 191.801,249.358 h1.83
  text "Hole Tolerance (+)" at 213.487,249.358 h1.83
  text "Hole Tolerance (-)" at 247.36,249.358 h1.83
  text "1" at 13.899,245.548 h1.52
  text "35.43mil (0.900mm)" at 29.135,245.548 h1.52
  text "NPTH" at 58.336,245.548 h1.52
  text "Round" at 71.185,245.548 h1.52
  text "Top Layer - Bottom Layer" at 89.824,245.548 h1.52
  text "Pad" at 127.913,245.548 h1.52
  text "Rounded" at 142.895,245.548 h1.52
  text "c90hn90m90" at 161.838,245.548 h1.52
  text "1" at 13.899,241.738 h1.52
  text "118.11mil (3.000mm)" at 29.135,241.738 h1.52
  text "NPTH" at 58.336,241.738 h1.52
  text "Round" at 71.185,241.738 h1.52
  text "Top Layer - Bottom Layer" at 89.824,241.738 h1.52
  text "Pad" at 127.913,241.738 h1.52
  text "Rounded" at 142.895,241.738 h1.52
  text "c0hn300(Tol14)" at 161.838,241.738 h1.52
  text "5.51mil (0.140mm)" at 213.487,241.738 h1.52
  text "2" at 13.899,237.928 h1.52
  text "59.06mil (1.500mm)" at 29.135,237.928 h1.52
  text "PTH" at 58.336,237.928 h1.52
  text "Round" at 71.185,237.928 h1.52
  text "Top Layer - Bottom Layer" at 89.824,237.928 h1.52
  text "Pad" at 127.913,237.928 h1.52
  text "Rounded" at 142.895,237.928 h1.52
  text "r250_300h150r100" at 161.838,237.928 h1.52
  text "4" at 13.899,234.118 h1.52
  text "30.00mil (0.762mm)" at 29.135,234.118 h1.52
  text "PTH" at 58.336,234.118 h1.52
  text "Round" at 71.185,234.118 h1.52
  text "Top Layer - Bottom Layer" at 89.824,234.118 h1.52
  text "Pad" at 127.913,234.118 h1.52
  text "(Mixed)" at 142.895,234.118 h1.52
  text "(Mixed)" at 161.838,234.118 h1.52
  text "4" at 13.899,230.308 h1.52
  text "60.00mil (1.524mm)" at 29.135,230.308 h1.52
  text "PTH" at 58.336,230.308 h1.52
  text "Round" at 71.185,230.308 h1.52
  text "Top Layer - Bottom Layer" at 89.824,230.308 h1.52
  text "Pad" at 127.913,230.308 h1.52
  text "(Mixed)" at 142.895,230.308 h1.52
  text "(Mixed)" at 161.838,230.308 h1.52
  text "6" at 13.899,226.498 h1.52
  text "118.11mil (3.000mm)" at 29.135,226.498 h1.52
  text "NPTH" at 58.336,226.498 h1.52
  text "Round" at 71.185,226.498 h1.52
  text "Top Layer - Bottom Layer" at 89.824,226.498 h1.52
  text "Pad" at 127.913,226.498 h1.52
  text "Rounded" at 142.895,226.498 h1.52
  text "c152hn300(Tol50-50)" at 161.838,226.498 h1.52
  text "19.69mil (0.500mm)" at 213.487,226.498 h1.52
  text "19.69mil (0.500mm)" at 247.36,226.498 h1.52
  text "7" at 13.899,222.688 h1.52
  text "78.74mil (2.000mm)" at 29.135,222.688 h1.52
  text "NPTH" at 58.336,222.688 h1.52
  text "Round" at 71.185,222.688 h1.52
  text "Top Layer - Bottom Layer" at 89.824,222.688 h1.52
  text "Pad" at 127.913,222.688 h1.52
  text "Rounded" at 142.895,222.688 h1.52
  text "c0hn200" at 161.838,222.688 h1.52
  text "8" at 13.899,218.878 h1.52
  text "19.69mil (0.500mm)" at 29.135,218.878 h1.52
  text "PTH" at 58.336,218.878 h1.52
  text "Round" at 71.185,218.878 h1.52
  text "Top Layer - Bottom Layer" at 89.824,218.878 h1.52
  text "Via" at 127.913,218.878 h1.52
  text "Rounded" at 142.895,218.878 h1.52
  text "v100h50" at 161.838,218.878 h1.52
  text "11" at 13.899,215.068 h1.52
  text "133.86mil (3.400mm)" at 29.135,215.068 h1.52
  text "NPTH" at 58.336,215.068 h1.52
  text "Round" at 71.185,215.068 h1.52
  text "Top Layer - Bottom Layer" at 89.824,215.068 h1.52
  text "Pad" at 127.913,215.068 h1.52
  text "Rounded" at 142.895,215.068 h1.52
  text "c0hn340(Tol18)" at 161.838,215.068 h1.52
  text "7.09mil (0.180mm)" at 213.487,215.068 h1.52
  text "18" at 13.899,211.258 h1.52
  text "31.50mil (0.800mm)" at 29.135,211.258 h1.52
  text "PTH" at 58.336,211.258 h1.52
  text "Round" at 71.185,211.258 h1.52
  text "Top Layer - Bottom Layer" at 89.824,211.258 h1.52
  text "Pad" at 127.913,211.258 h1.52
  text "(Mixed)" at 142.895,211.258 h1.52
  text "(Mixed)" at 161.838,211.258 h1.52
  text "78" at 13.899,207.448 h1.52
  text "31.50mil (0.800mm)" at 29.135,207.448 h1.52
  text "PTH" at 58.336,207.448 h1.52
  text "Round" at 71.185,207.448 h1.52
  text "Top Layer - Bottom Layer" at 89.824,207.448 h1.52
  text "Pad" at 127.913,207.448 h1.52
  text "Rounded" at 142.895,207.448 h1.52
  text "c150h80" at 161.838,207.448 h1.52
  text "78" at 13.899,203.638 h1.52
  text "35.43mil (0.900mm)" at 29.135,203.638 h1.52
  text "PTH" at 58.336,203.638 h1.52
  text "Round" at 71.185,203.638 h1.52
  text "Top Layer - Bottom Layer" at 89.824,203.638 h1.52
  text "Pad" at 127.913,203.638 h1.52
  text "(Mixed)" at 142.895,203.638 h1.52
  text "(Mixed)" at 161.838,203.638 h1.52
  text "154" at 13.899,199.828 h1.52
  text "43.31mil (1.100mm)" at 29.135,199.828 h1.52
  text "PTH" at 58.336,199.828 h1.52
  text "Round" at 71.185,199.828 h1.52
  text "Top Layer - Bottom Layer" at 89.824,199.828 h1.52
  text "Pad" at 127.913,199.828 h1.52
  text "(Mixed)" at 142.895,199.828 h1.52
  text "(Mixed)" at 161.838,199.828 h1.52
  text "411" at 13.899,196.018 h1.52
  text "11.81mil (0.300mm)" at 29.135,196.018 h1.52
  text "PTH" at 58.336,196.018 h1.52
  text "Round" at 71.185,196.018 h1.52
  text "Top Layer - Bottom Layer" at 89.824,196.018 h1.52
  text "Via" at 127.913,196.018 h1.52
  text "Rounded" at 142.895,196.018 h1.52
  text "(Mixed)" at 161.838,196.018 h1.52
  text "783 Total" at 13.899,192.208 h1.52
Mechanical 22:
  lines w0.127: 192.176,149.328 192.176,142.47 200.304,142.47 200.304,149.328 ; 171.856,95.328 171.856,149.328 191.592,149.328 191.592,147.829 200.863,147.829 200.863,149.328 209.854,149.328 209.854,95.328 171.856,95.328

## Dimensions
1.27,0 to 1.274,180 on Drill Drawing
0,0 to 240,1.27 on Drill Drawing

## Text inside footprints (layer, text, board x,y; h text height)
DHT1: Top Overlay "1" at 212.624,148.08 h1.27 r270
H_ACOMS: Top Overlay "2" at 142.26,100.882 h1.27; Top Overlay "1" at 142.26,98.342 h1.27; Top Overlay "15" at 164.104,98.342 h1.27; Top Overlay "16" at 164.104,100.882 h1.27
H_AIO: Top Overlay "2" at 234.532,116.54 h1.27 r270; Top Overlay "1" at 231.992,116.54 h1.27 r270; Top Overlay "15" at 231.992,94.696 h1.27 r270; Top Overlay "16" at 234.532,94.696 h1.27 r270
H_ASW1: Top Overlay "56" at 110.612,12.032 h1.27; Top Overlay "55" at 110.612,9.492 h1.27; Top Overlay "1" at 37.46,9.492 h1.27; Top Overlay "2" at 37.46,12.032 h1.27
H_ASW2P: Top Overlay "2" at 234.532,74.54 h1.27 r270; Top Overlay "1" at 231.992,74.54 h1.27 r270; Top Overlay "15" at 231.992,52.696 h1.27 r270; Top Overlay "16" at 234.532,52.696 h1.27 r270
H_PIO: Top Overlay "18" at 8.382,76.648 h1.27 r270; Top Overlay "17" at 5.842,76.648 h1.27 r270; Top Overlay "1" at 5.842,101.54 h1.27 r270; Top Overlay "2" at 8.382,102.048 h1.27 r270
H_PSW: Top Overlay "2" at 8.382,57.04 h1.27 r270; Top Overlay "1" at 5.842,57.04 h1.27 r270; Top Overlay "15" at 5.842,35.196 h1.27 r270; Top Overlay "16" at 8.382,35.196 h1.27 r270
H_TCA: Top Overlay "2" at 63.96,100.882 h1.27; Top Overlay "1" at 63.96,98.342 h1.27; Top Overlay "15" at 85.804,98.342 h1.27; Top Overlay "16" at 85.804,100.882 h1.27
P1: Top Overlay "1" at 181.764,166.958 h1.27 r180
Rpi_GPIO1: Top Overlay "39" at 31,129 h1.27 r270; Top Overlay "40" at 30,121.73 h1.27 r270; Top Overlay "2" at 83,121 h1.27 r270; Top Overlay "1" at 83,125 h1.27 r270
TRACO_1: Top Overlay "1" at 108.754,158.26 h1.27; Top Overlay "2" at 134.154,164.61 h1.27; Top Overlay "3" at 108.754,150.64 h1.27; Top Overlay "4" at 134.154,144.29 h1.27